# EAGLE board PCB moved parts (EAGLE 8.7.0)
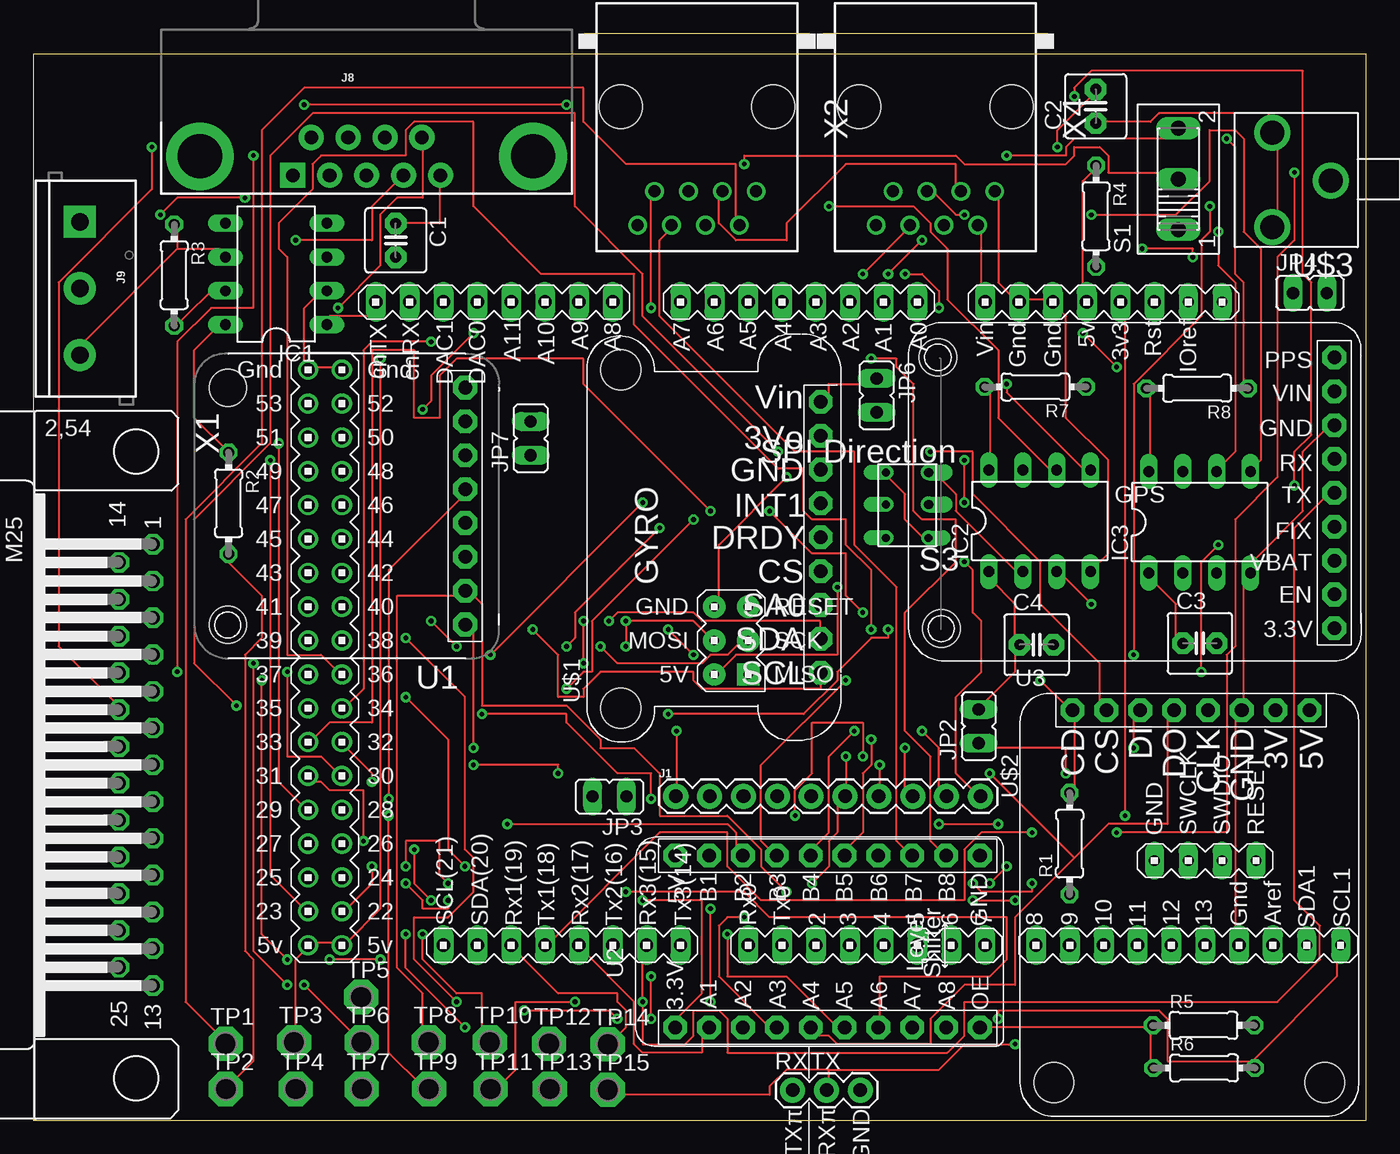
[diagram p0: board, top side]
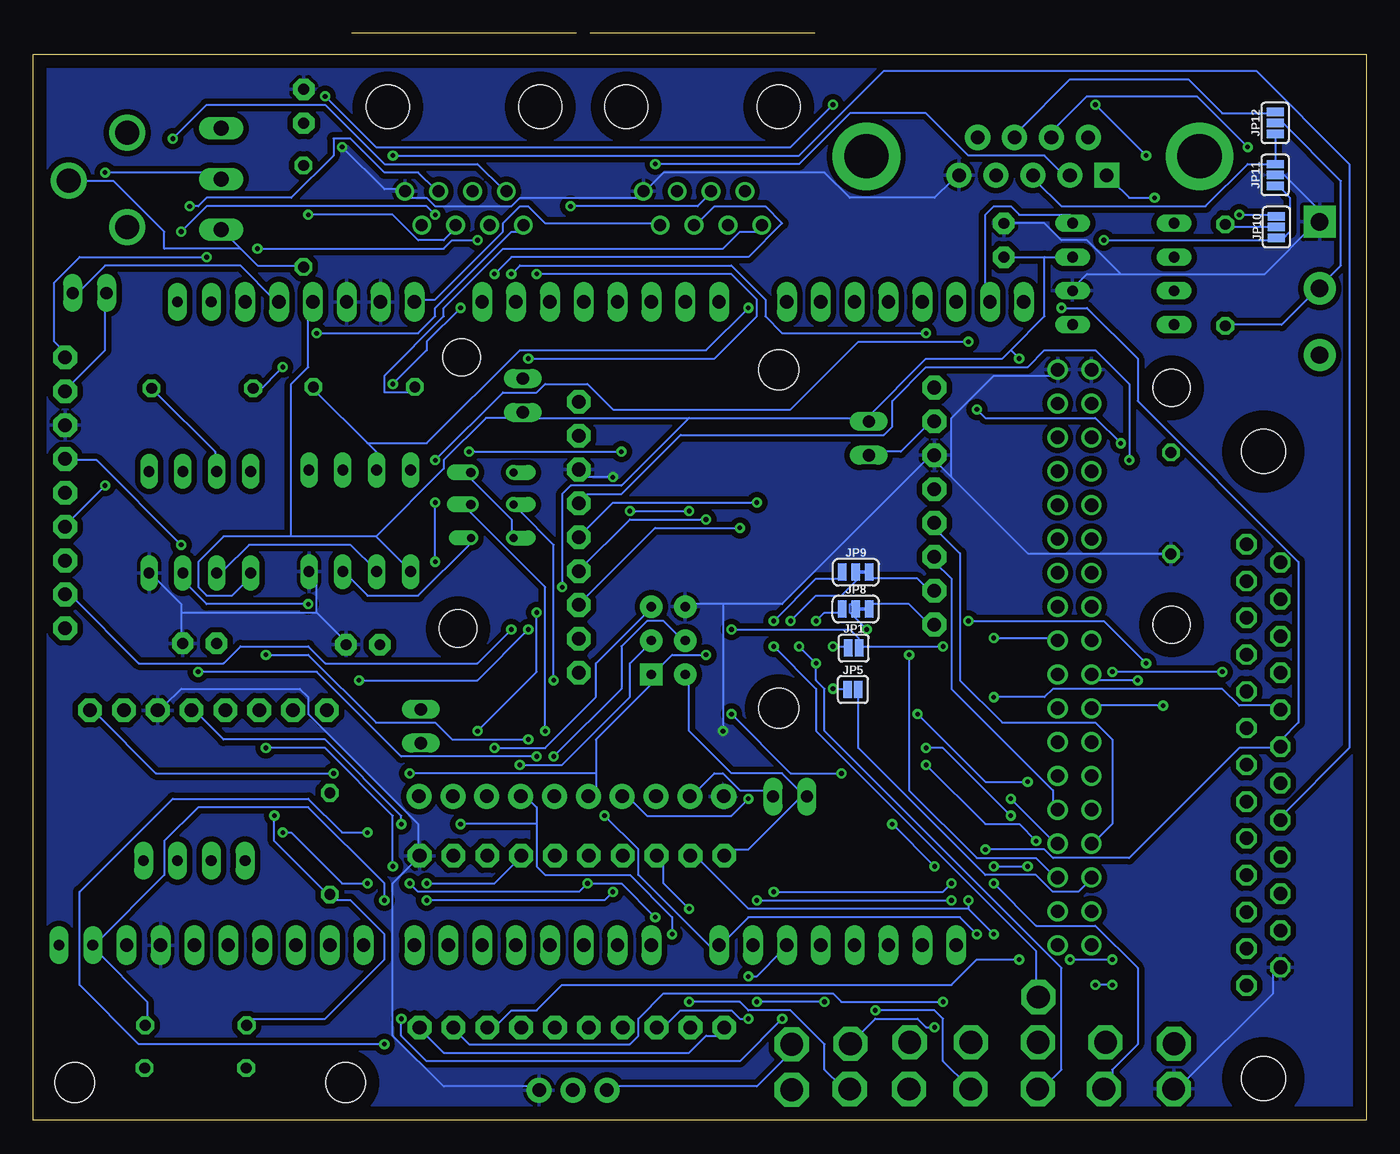
[diagram p1: board, bottom side, seen from below]

Size 100 x 80 mm. Coordinates in mm from the lower left corner, seen from the top.
Outline: 0,0 100,0 100,80 0,80 0,0
Copper layers (1*16): Top 0.035mm / dielectric 1.5mm / Bottom 0.035mm
Design rules "default": minimum track width 6mil, minimum drill 0.35mm, track to track 6mil, track to pad 6mil, pad to pad 6mil, via to via 6mil, smd to smd 6mil, copper to edge 40mil, drill to drill 6mil, minimum pad ring 10mil, minimum via ring 8mil, stop-mask expansion 4mil, vias tented up to drill 0mil, thermal gap 10mil
Net classes: 1 Power: width 0.508 mm, drill 0.305 mm, clearance 0.254 mm

## Footprints (pad centres in the part's own frame; a part is rotated, then mirrored left to right if it is on the bottom)
C2.5-5 = drill 0.813 pad 1.6 octagon: 1 -1.27,0; 2 1.27,0
DIL08 = drill 0.813 long: 1 -3.81,-3.81; 2 -1.27,-3.81; 3 1.27,-3.81; 4 3.81,-3.81; 5 3.81,3.81; 6 1.27,3.81; 7 -1.27,3.81; 8 -3.81,3.81
1X10 = drill 1.016 pad 1.88: 1 0,0; 2 2.54,0; 3 5.08,0; 4 7.62,0; 5 10.16,0; 6 12.7,0; 7 15.24,0; 8 17.78,0; 9 20.32,0; 10 22.86,0
1X03 = drill 1.016 pad 1.88: 1 2.54,0; 2 0,0; 3 -2.54,0
DB9_MALE = drill 1.016 pad 1.88: 1 5.54,-1.42; 2 2.77,-1.42; 3 0,-1.42; 4 -2.77,-1.42; 6 4.15,1.42; 7 1.38,1.42; 8 -1.38,1.42; 9 -4.15,1.42 | drill 1.016 pad 1.88 square: 5 -5.54,-1.42 | drill 3.302 pad 5.08: G1 -12.5,0; G2 12.5,0
SCREWTERMINAL-5MM-3 = drill 1.3 pad 2.413 square: 1 0,0 | drill 1.3 pad 2.413: 2 5,0; 3 10,0
SMT-JUMPER_2_NO_SILK = smd 0.635 x 1.27: 1 -0.406,0; 2 0.406,0
JP1 = drill 0.914 long: 1 0,-1.27; 2 0,1.27
SMT-JUMPER_3_1-NC_TRACE_SILK = smd 0.635 x 1.27: 1 -1.016,0; 2 0,0; 3 1.016,0
SMT-JUMPER_3_NO_SILK = smd 0.635 x 1.27: 1 -0.813,0; 2 0,0; 3 0.813,0
DUE(NORMAL) = drill 1 long: 2 -16.51,30.48; 3 -19.05,30.48; 3V3 -39.37,-17.78; 4 -21.59,30.48; 5 -24.13,30.48; 5V -36.83,-17.78; 6 -26.67,30.48; 7 -29.21,30.48; 8 -33.02,30.48; 9 -35.56,30.48; 10 -38.1,30.48; 11 -40.64,30.48; 12 -43.18,30.48; 13 -45.72,30.48; A0 -24.13,-17.78; A1 -21.59,-17.78; A2 -19.05,-17.78; A3 -16.51,-17.78; A4 -13.97,-17.78; A5 -11.43,-17.78; A6 -8.89,-17.78; A7 -6.35,-17.78; A8 -1.27,-17.78; A9 1.27,-17.78; A10 3.81,-17.78; A11 6.35,-17.78; AREF -50.8,30.48; CANRX 13.97,-17.78; CANTX 16.51,-17.78; DAC0 8.89,-17.78; DAC1 11.43,-17.78; GND1 -48.26,30.48; GND_1 -34.29,-17.78; GND_2 -31.75,-17.78; RESET -41.91,-17.78; RX0 -11.43,30.48; RX1 6.35,30.48; RX2 1.27,30.48; RX3 -3.81,30.48; SCL 11.43,30.48; SDA 8.89,30.48; TX0 -13.97,30.48; TX1 3.81,30.48; TX2 -1.27,30.48; TX3 -6.35,30.48; VIN -29.21,-17.78 | drill 1: 5V_A 19.05,30.48; 5V_B 21.59,30.48; 22 19.05,27.94; 23 21.59,27.94; 24 19.05,25.4; 25 21.59,25.4; 26 19.05,22.86; 27 21.59,22.86; 28 19.05,20.32; 29 21.59,20.32; 30 19.05,17.78; 31 21.59,17.78; 32 19.05,15.24; 33 21.59,15.24; 34 19.05,12.7; 35 21.59,12.7; 36 19.05,10.16; 37 21.59,10.16; 38 19.05,7.62; 39 21.59,7.62; 40 19.05,5.08; 41 21.59,5.08; 42 19.05,2.54; 43 21.59,2.54; 44 19.05,0; 45 21.59,0; 46 19.05,-2.54; 47 21.59,-2.54; 48 19.05,-5.08; 49 21.59,-5.08; 50 19.05,-7.62; 51 21.59,-7.62; 52 19.05,-10.16; 53 21.59,-10.16; GND_A 19.05,-12.7; GND_B 21.59,-12.7 | drill 0.7 pad 1.676: 5V_ICSP -8.89,5.08; GND_ICSP -8.89,10.16; MOSI_ICSP -8.89,7.62; RESET_ICSP -11.43,5.08; SCK_ICSP -11.43,7.62 | drill 0.8 pad 1.422 long: GND_DEBUG -41.91,24.13; IOREF -44.45,-17.78; NC -46.99,-17.78; RESET_DEBUG -49.53,24.13; SCL1 -55.88,30.48; SDA1 -53.34,30.48; SWCLK_DEBUG -44.45,24.13; SWDIO_DEBUG -46.99,24.13 | drill 0.7 pad 1.676 square: MISO_ICSP -11.43,10.16
0204/7 = drill 0.813 octagon: 1 -3.81,0; 2 3.81,0
255SB = drill 1.118 long: 1 -3.81,0; 2 0,0; 3 3.81,0
DPDT = drill 0.6 offset: 1 3.2,4.9; 2 3.2,2.4; 3 3.2,0; 4 0,4.9 | drill 0.7 offset: 5 0,2.4; 6 0,0
P1-17 = drill 1.702 pad 2.54 octagon: TP 0,0
ELCOMPASS = drill 1.016 pad 1.778 octagon: 1 1.27,1.27; 2 1.27,3.81; 3 1.27,6.35; 4 1.27,8.89; 5 1.27,11.43; 6 1.27,13.97; 7 1.27,16.51; 8 1.27,19.05 | hole 2.8: 19.066,19.07; 19.066,1.29
ELSHIFTER = drill 1.016 pad 1.778 octagon: 1 0,11.43; 2 0,8.89; 3 0,6.35; 4 0,3.81; 5 0,1.27; 6 0,-1.27; 7 0,-3.81; 8 0,-6.35; 9 0,-8.89; 10 0,-11.43; 11 12.89,11.43; 12 12.89,8.89; 13 12.89,6.35; 14 12.89,3.81; 15 12.89,1.27; 16 12.89,-1.27; 17 12.89,-3.81; 18 12.89,-6.35; 19 12.89,-8.89; 20 12.89,-11.43
ELGPS = drill 1.016 pad 1.778 octagon: 1 0,-10.16; 2 0,-7.62; 3 0,-5.08; 4 0,-2.54; 5 0,0; 6 0,2.54; 7 0,5.08; 8 0,7.62; 9 0,10.16 | hole 2.8: 29.48,10.18; 29.74,-10.18
ELGYRO = drill 1.016 pad 1.778 octagon: 1 21.59,2.54; 2 19.05,2.54; 3 16.51,2.54; 4 13.97,2.54; 5 11.43,2.54; 6 8.89,2.54; 7 6.35,2.54; 8 3.81,2.54; 9 1.27,2.54 | hole 3: -1.397,17.526; 24.003,17.526
ELSDCARD = drill 1.016 pad 1.778 octagon: 1 1.27,1.27; 2 1.27,3.81; 3 1.27,6.35; 4 1.27,8.89; 5 1.27,11.43; 6 1.27,13.97; 7 1.27,16.51; 8 1.27,19.05 | hole 3: -26.67,0.127; -26.67,20.447
2.5MMJACK = drill 1.8: 1 2,5.1; 2 6.4,1.5; 3 6.4,8.6
M25H = drill 1.016 octagon: 1 -16.561,1.27; 2 -13.792,1.27; 3 -11.049,1.27; 4 -8.28,1.27; 5 -5.512,1.27; 6 -2.769,1.27; 7 0,1.27; 8 2.769,1.27; 9 5.512,1.27; 10 8.28,1.27; 11 11.049,1.27; 12 13.792,1.27; 13 16.561,1.27; 14 -15.189,-1.27; 15 -12.421,-1.27; 16 -9.652,-1.27; 17 -6.909,-1.27; 18 -4.14,-1.27; 19 -1.372,-1.27; 20 1.372,-1.27; 21 4.14,-1.27; 22 6.909,-1.27; 23 9.652,-1.27; 24 12.421,-1.27; 25 15.189,-1.27 | hole 3.302: 23.52,0; -23.52,0
RJ45-NO-SHIELD = drill 0.9 pad 1.4: 1 -4.445,6.35; 2 -3.175,8.89; 3 -1.905,6.35; 4 -0.635,8.89; 5 0.635,6.35; 6 1.905,8.89; 7 3.175,6.35; 8 4.445,8.89 | hole 3.251: -5.715,0; 5.715,0

## Placement (x,y rotation side)
C1  0.1 uF  [C2.5-5]  27.19,66.03 270 top
C2  1 uF  [C2.5-5]  79.71,76.09 90 top
C3  0.1 uF  [C2.5-5]  87.52,35.79 0 top
C4  0.1 uF  [C2.5-5]  75.27,35.69 0 top
IC1  MCP2551  [DIL08]  18.22,63.51 90 top
IC2  DS8921  [DIL08]  75.51,44.98 0 top
IC3  DS8921  [DIL08]  87.51,44.88 0 top
J1  Optical Mouse  [1X10]  48.2,24.32 0 top
J2  RaspπUart  [1X03]  59.51,2.26 180 top
J8  DB9 Plug  [DB9_MALE]  25,72.33 0 top
J9  CAN Output  [SCREWTERMINAL-5MM-3]  3.49,67.42 270 top
JP1  [SMT-JUMPER_2_NO_SILK]  38.45,35.43 0 bottom
JP2  MicroSD Power  [JP1]  70.92,29.57 0 top
JP3  Mouse Power  [JP1]  43.23,24.3 90 top
JP4  GPS Power  [JP1]  95.78,62.07 270 top
JP5  [SMT-JUMPER_2_NO_SILK]  38.51,32.33 0 bottom
JP6  Gyro Power  [JP1]  63.28,54.39 180 top
JP7  Compass Power  [JP1]  37.31,51.17 0 top
JP8  [SMT-JUMPER_3_1-NC_TRACE_SILK]  38.3,38.37 0 bottom
JP9  [SMT-JUMPER_3_1-NC_TRACE_SILK]  38.29,41.13 0 bottom
JP10  [SMT-JUMPER_3_NO_SILK]  6.73,67.02 90 bottom
JP11  [SMT-JUMPER_3_NO_SILK]  6.83,70.93 90 bottom
JP12  [SMT-JUMPER_3_NO_SILK]  6.83,74.84 90 bottom
MCU2  DUE(NORMAL)  [DUE(NORMAL)]  42.2,43.62 180 top
R1  4.7 k  [0204/7]  77.75,20.76 90 top
R2  10 k  [0204/7]  14.65,46.3 270 top
R3  120  [0204/7]  10.57,63.42 270 top
R4  4.7 k  [0204/7]  79.73,67.84 270 top
R5  4.7 k  [0204/7]  87.8,7.13 0 top
R6  4.7 k  [0204/7]  87.84,3.93 0 top
R7  100  [0204/7]  75.18,55.03 180 top
R8  100  [0204/7]  87.32,54.93 180 top
S1  Click Source  [255SB]  85.91,70.63 90 top
S3  SPI Direction  [DPDT]  67.17,48.61 180 top
TP1  TPPAD1-17  [P1-17]  14.42,5.75 0 top
TP2  TPPAD1-17  [P1-17]  14.44,2.35 0 top
TP3  TPPAD1-17  [P1-17]  19.56,5.85 0 top
TP4  TPPAD1-17  [P1-17]  19.68,2.35 0 top
TP5  TPPAD1-17  [P1-17]  24.6,9.25 0 top
TP6  TPPAD1-17  [P1-17]  24.62,5.85 0 top
TP7  TPPAD1-17  [P1-17]  24.64,2.35 0 top
TP8  TPPAD1-17  [P1-17]  29.66,5.85 0 top
TP9  TPPAD1-17  [P1-17]  29.68,2.35 0 top
TP10  TPPAD1-17  [P1-17]  34.25,5.85 0 top
TP11  TPPAD1-17  [P1-17]  34.3,2.35 0 top
TP12  TPPAD1-17  [P1-17]  38.7,5.75 0 top
TP13  TPPAD1-17  [P1-17]  38.75,2.35 0 top
TP14  TPPAD1-17  [P1-17]  43.1,5.7 0 top
TP15  TPPAD1-17  [P1-17]  43.1,2.3 0 top
U1  COMPASS  [ELCOMPASS]  33.67,56.25 180 top
U2  LLSHIFTER  [ELSHIFTER]  59.59,6.97 90 top
U3  GPS  [ELGPS]  97.61,47.08 180 top
U$1  Gyro  [ELGYRO]  61.61,32.32 90 top
U$2  Micro-SD  [ELSDCARD]  97.02,29.5 90 top
U$3  [2.5MMJACK]  99.36,75.6 180 top
X1  Vehicle control  [M25H]  7.71,26.67 270 top
X2  RJ45-8L-B  [RJ45-NO-SHIELD]  49.79,76.05 180 top
X4  RJ45-8L-B  [RJ45-NO-SHIELD]  67.68,76.05 180 top

## Library data of the parts
C1-C4 = capacitor-wima
IC1-IC3 = ic-package
J1 = SparkFun-Connectors; PROD_ID: CONN-11563
J2 = tx_rxRasp
J8 = SparkFun-Connectors; PROD_ID: CONN-09904; SPICEPREFIX: X
J9 = SparkFun-Connectors; PROD_ID: CONN-10134; SF_SKU: PRT-08433
JP1 JP5 JP8-JP12 = SparkFun-Jumpers
JP2-JP4 JP6 JP7 = jumper
MCU2 = DUElib130425
R1 R4-R6 = resistor
R2 R3 R7 R8 = rcl; SPICEPREFIX: R
S1 = switch
S3 U$1-U$3 = ELCano_Footprints
TP1-TP15 = testpad
U1 = ELCOMPASS
U2 = ELSHIFTER
U3 = ELGPS
X1 = con-subd; OC_FARNELL: unknown; OC_NEWARK: unknown
X2 X4 = con-tycoelectronics; MF: TYCO ELECTRONICS; MPN: RJ45-8L-B; OC_FARNELL: 1279843; OC_NEWARK: 52K4445

## Nets
+3V3: JP4.2 MCU2.3V3 R1.1 R5.1 R6.1 TP4.TP U2.1 U2.10
+5V: C1.2 C3.1 C4.1 IC1.3 IC2.1 IC3.1 JP2.2 JP3.2 JP6.2 JP7.2 MCU2.5V MCU2.5V_A MCU2.5V_B MCU2.GND_ICSP R4.1 TP3.TP U2.11
C2_RX: J8.8 TP13.TP U2.13 X1.18
C2_TX: J8.6 TP12.TP U2.12 X1.19
CANH: IC1.7 J9.2 JP12.2 R3.2
CANL: IC1.6 J9.3 JP10.2 R3.1
CANRX: IC1.4 MCU2.CANRX
CANTX: IC1.1 MCU2.CANTX
CARD_DETECT: MCU2.36 R1.2 U$2.8
CLICK: J8.4 S1.2 U2.17
CS_C5_FRONT: MCU2.37 U2.8
CS_C5_FRONT_5V: U2.18 X2.6
CS_C5_REAR: MCU2.38 U2.9
CS_C5_REAR_5V: U2.19 X4.6
CS_GYRO: JP5.2 MCU2.25
CS_MOUSE: J1.4 MCU2.32
CS_SD: MCU2.35 U$2.7
DRDY_C: MCU2.26 U1.4
DRDY_G: MCU2.24 U$1.5
EN: MCU2.31 U3.8
FIX: MCU2.30 U3.6
GND: C1.1 C2.2 C3.2 C4.2 IC1.2 IC2.4 IC3.4 J1.1 J2.3 J8.1 J9.1 JP11.2 MCU2.5V_ICSP MCU2.GND1 MCU2.GND_1 MCU2.GND_2 MCU2.GND_A MCU2.GND_B R2.2 TP2.TP U1.3 U2.20 U3.3 U$1.3 U$2.3 X1.25 X2.1 X4.1
GPS_RX: MCU2.TX3 TP10.TP U3.4
GPS_TX: MCU2.RX3 TP11.TP U3.5
I1: MCU2.27 U1.5
I2: MCU2.28 U1.6
INT1: MCU2.23 U$1.4
LED: J1.10 MCU2.34
MISO: J1.5 JP1.2 MCU2.MISO_ICSP TP6.TP U2.5 U$2.5
MISO+: IC2.6 X2.5
MISO+R: IC3.6 X4.5
MISO-: IC2.5 X2.4
MISO-R: IC3.5 X4.4
MISO_5V: S3.5 U2.15
MOSI: J1.6 JP9.1 MCU2.MOSI_ICSP TP5.TP U2.4 U$2.6
MOSI+: IC2.8 R7.2 X2.8
MOSI+R: IC3.8 R8.2 X4.8
MOSI-: IC2.7 R7.1 X2.7
MOSI-R: IC3.7 R8.1 X4.7
MOSI_5V: S3.2 U2.14
N$1: C2.1 U$3.2 U$3.3
N$2: IC2.2 IC3.2 S3.1 S3.6
N$3: IC2.3 IC3.3 S3.3 S3.4
N$4: MCU2.TX2 U2.3
N$5: MCU2.RX2 U2.2
N$6: S1.3 X1.21
N$7: R4.2 S1.1 U$3.1
N$8: JP7.1 U1.2
N$9: JP6.1 U$1.1
N$10: JP2.1 U$2.1
N$11: J8.3 JP11.3 JP12.1
N$12: MCU2.22 U2.7
N$13: J1.2 JP3.1
N$14: JP4.1 U3.2
N$15: J8.5 JP10.3
N$16: J8.7 JP12.3
N$17: IC1.8 R2.1
N$18: J8.2 JP10.1 JP11.1
N$19: JP5.1 U$1.6
N$20: JP1.1 U$1.7
N$21: JP9.2 U$1.8
N$22: JP8.2 U$1.9
NPD: J1.9 MCU2.33
PPS: MCU2.29 U3.1
RPI_RX: J2.2 MCU2.TX1 TP15.TP
RPI_TX: J2.1 MCU2.RX1 TP14.TP
RST: J1.8 MCU2.RESET_ICSP
SCK: J1.7 JP8.1 MCU2.SCK_ICSP TP7.TP U2.6 U$2.4
SCK_5V: U2.16 X2.3 X4.3
SCL1: JP8.3 MCU2.SCL1 R6.2 TP9.TP U1.8
SDA1: JP9.3 MCU2.SDA1 R5.2 TP8.TP U1.7
VIN: MCU2.VIN TP1.TP X2.2 X4.2

## Tracks (layer width: path | path; a pad name or v marks a point on that pad's centre or on a via)
+3V3  (via drill 0.35)
  Top 0.152: v27.94,17.78 29.21,16.51 29.21,15.88 31.11,15.88 v31.11,16.51 | v45.72,16.51 50.16,16.51 50.16,9.53 48.26,7.62 48.26,6.99 U2.1 | 83.82,6.99 83.82,4.45 R6.1 | v81.92,22.86 81.92,60.96 MCU2.3V3 | 83.82,6.99 71.12,6.99 U2.10 | 83.82,6.99 R5.1
  Bottom 0.152: U2.1 48.26,6.35 49.53,6.35 50.8,5.08 69.22,5.08 70.48,6.35 U2.10 | v27.94,17.78 24.77,14.61 20.32,14.61 17.14,11.43 17.14,5.71 19.05,3.81 19.05,2.54 TP4.TP | v45.72,16.51 v31.11,16.51 | JP4.2 96.52,62.23 94.61,64.14 84.45,64.14 81.92,61.59 MCU2.3V3 | R5.1 83.82,7.62 78.11,7.62 73.66,12.06 73.66,13.97 76.2,16.51 77.47,16.51 R1.1 78.11,17.14 81.92,20.95 v81.92,22.86
+5V  (via drill 0.35)
  Top 0.152: R4.1 79.38,71.12 78.74,70.48 78.74,61.59 MCU2.5V | IC3.1 83.82,40.64 85.72,38.73 85.72,36.2 C3.1 | IC2.1 71.75,40.64 73.66,38.73 73.66,36.2 C4.1 73.66,35.56 73.66,33.66 71.12,31.11 JP2.2 | TP3.TP 19.68,6.35 19.68,12.06 20.32,12.7 MCU2.5V_B 20.95,13.34 22.86,13.34 MCU2.5V_A 23.5,13.34 26.04,15.88 v26.04,57.15 | v60.33,40.01 60.33,34.92 52.7,34.92 51.44,33.66 MCU2.GND_ICSP
  Bottom 0.152: 74.3,43.81 80.64,43.81 | 80.64,43.81 85.72,43.81 87.63,41.91 87.63,40.01 87,39.37 85.09,39.37 83.82,40.64 IC3.1 | 74.3,43.81 71.75,41.27 IC2.1 | 80.64,43.81 80.64,55.24 79.38,56.52 79.38,60.96 MCU2.5V | U2.11 47.62,20.32 46.35,20.32 42.55,24.13 JP3.2 42.55,24.77 43.81,26.04 47.62,26.04 50.8,29.21 50.8,33.02 MCU2.GND_ICSP | 24.13,64.77 26.67,64.77 C1.2 | 24.13,64.77 22.23,64.77 IC1.3 | 50.8,52.7 62.87,52.7 JP6.2 63.5,52.7 66.04,52.7 69.22,49.53 69.22,48.9 74.3,43.81 | 50.8,52.7 37.47,52.7 | 24.13,64.77 24.13,60.33 26.67,57.78 | 26.67,57.78 27.3,57.15 33.02,57.15 37.47,52.7 | 37.47,52.7 JP7.2 | 26.67,57.78 v26.04,57.15 | v60.33,40.01 60.33,46.99 59.69,47.62 55.88,47.62 50.8,52.7
C2_RX  (via drill 0.35)
  Top 0.152: v50.8,8.89 v50.8,15.88 | v8.89,73.03 8.89,69.85 1.91,62.87 1.91,35.56 6.35,31.11 X1.18 | v35.56,22.23 52.07,22.23 52.7,21.59 52.7,20.32 U2.13 | v32.38,19.05 31.11,20.32 31.11,28.57 v27.94,31.75
  Bottom 0.152: v50.8,15.88 52.7,17.78 52.7,19.68 U2.13 | v50.8,8.89 46.99,8.89 46.35,8.26 43.18,8.26 40.64,5.71 40.64,3.81 39.37,2.54 TP13.TP | v8.89,73.03 12.7,76.83 20.95,76.83 23.5,74.3 J8.8 | v32.38,19.05 v35.56,22.23 | v27.94,31.75 24.13,31.75 23.5,32.38 10.79,32.38 9.53,31.11 6.99,31.11 X1.18
C2_TX  (via drill 0.35)
  Top 0.152: v27.94,13.97 27.94,11.43 v32.38,6.99 | v22.86,60.96 26.04,64.14 26.04,67.94 27.3,69.22 29.21,69.22 29.21,73.66 J8.6 | v29.84,16.51 28.57,17.78 v28.57,20.32
  Bottom 0.152: 29.84,15.88 46.35,15.88 50.16,19.68 U2.12 | v27.94,13.97 29.84,15.88 | v32.38,6.99 33.02,6.99 33.66,7.62 36.83,7.62 TP12.TP | v22.86,60.96 20.95,60.96 17.14,57.15 17.14,53.98 5.08,41.91 5.08,29.84 6.35,28.57 X1.19 6.99,27.94 9.53,27.94 17.78,19.68 23.5,19.68 24.13,20.32 v28.57,20.32 | v29.84,16.51 29.84,15.88
CANH
  Top 0.152: R3.2 10.79,59.69 13.97,62.87 IC1.7
  Bottom 0.152: JP12.2 6.35,74.93 1.91,70.48 1.91,64.14 3.17,62.87 J9.2 3.81,62.23 6.35,59.69 10.16,59.69 R3.2
CANL
  Top 0.152: 10.79,65.41 13.97,65.41 IC1.6 | 10.79,65.41 10.79,66.67 R3.1 | 10.79,65.41 3.81,58.42 3.81,57.78 J9.3
  Bottom 0.152: JP10.2 10.36,67.02 R3.1
CANRX
  Bottom 0.152: IC1.4 22.23,67.94 26.04,67.94 26.67,68.58 27.94,68.58 28.57,67.94 28.57,61.59 MCU2.CANRX
CANTX
  Top 0.152: IC1.1 22.23,60.33 25.4,60.33 25.4,60.96 MCU2.CANTX
CARD_DETECT  (via drill 0.35)
  Top 0.152: R1.2 78.11,24.77 78.11,30.48 U$2.8 77.47,31.11 v75.56,33.02 | v62.87,36.83 62.87,41.27 60.96,43.18 60.96,45.09 58.42,45.09 57.78,45.72 57.78,48.9 55.88,48.9 45.09,59.69 45.09,63.5 38.1,63.5 33.02,68.58 33.02,74.93 28.57,74.93 27.94,74.3 27.94,72.39 21.59,72.39 20.95,71.75 20.95,69.85 18.41,67.31 18.41,65.41 19.05,64.77 19.05,34.92 21.59,34.92 22.86,33.66 MCU2.36
  Bottom 0.152: v62.87,36.83 66.67,33.02 v75.56,33.02
CLICK  (via drill 0.35)
  Top 0.152: v53.34,71.75 53.34,72.39 69.22,72.39 69.85,71.75 77.47,71.75 78.11,72.39 78.11,73.03 80.01,73.03 80.64,72.39 80.64,71.12 85.72,71.12 S1.2 | v70.48,17.78 71.12,17.14 74.93,17.14 v74.93,17.78 | v81.28,21.59 89.53,21.59 89.53,34.92 90.17,35.56 90.17,45.09 93.34,48.26 93.34,64.77 94.61,66.04 v94.61,71.12
  Bottom 0.152: v53.34,71.75 42.55,71.75 38.73,75.56 33.02,75.56 29.84,72.39 24.13,72.39 22.86,71.12 J8.4 | v70.48,17.78 65.41,17.78 63.5,19.68 U2.17 | v74.93,17.78 76.83,17.78 80.64,21.59 v81.28,21.59 | v94.61,71.12 86.36,71.12 S1.2
CS_C5_FRONT  (via drill 0.35)
  Top 0.152: v17.14,33.02 17.14,13.97 v19.05,12.06 | v26.04,12.06 v22.23,12.06
  Bottom 0.152: v17.14,33.02 20.32,33.02 MCU2.37 | v22.23,12.06 v19.05,12.06 | v26.04,12.06 29.21,12.06 31.11,10.16 60.33,10.16 62.23,8.26 64.14,8.26 65.41,6.99 U2.8
CS_C5_FRONT_5V
  Top 0.152: X2.6 47.62,66.67 46.99,66.04 46.99,60.33 57.15,50.16 61.59,50.16 61.59,43.18 64.77,40.01 64.77,20.95 65.41,20.32 U2.18
CS_C5_REAR  (via drill 0.35)
  Top 0.152: v27.94,36.2 32.38,31.75 32.38,20.32 33.02,19.68 33.02,17.14 31.11,15.24 28.57,15.24 28.57,12.06 v31.75,8.89
  Bottom 0.152: v27.94,36.2 23.5,36.2 MCU2.38 | v31.75,8.89 39.37,8.89 40.01,9.53 52.7,9.53 54.61,7.62 54.61,6.35 55.24,5.71 67.31,5.71 67.94,6.35 U2.9
CS_C5_REAR_5V  (via drill 0.35)
  Top 0.152: v62.23,63.5 65.41,66.67 X4.6 | v62.87,57.15 64.77,57.15 64.77,56.52 66.04,55.24 66.04,45.72 66.67,45.09 69.22,45.09 69.22,41.91 65.41,38.1 65.41,29.21 67.31,27.3 67.31,20.95 67.94,20.32 U2.19
  Bottom 0.152: v62.23,63.5 47.62,63.5 45.72,61.59 45.72,60.33 48.9,57.15 v62.87,57.15
CS_GYRO
  Bottom 0.152: JP5.2 38.1,31.75 38.1,27.94 28.57,18.41 24.77,18.41 23.5,17.14 21.59,17.14 20.95,17.78 MCU2.25
CS_MOUSE  (via drill 0.35)
  Top 0.152: v25.4,25.4 25.4,26.04 23.5,27.94 MCU2.32 | v33.66,30.48 40.01,30.48 40.01,29.84 43.81,26.04 46.35,26.04 v46.35,24.13
  Bottom 0.152: v25.4,25.4 28.57,25.4 v33.66,30.48 | v46.35,24.13 47.62,22.86 53.98,22.86 55.24,24.13 J1.4
CS_SD  (via drill 0.35)
  Top 0.152: v15.24,31.11 12.06,34.29 12.06,45.09 17.78,50.8 17.78,72.39 20.95,75.56 40.64,75.56 40.64,68.58 45.72,63.5 45.72,60.33 v55.88,50.16 | v67.31,50.16 70.48,50.16 70.48,46.99 75.56,41.91 75.56,38.73 80.01,34.29 80.01,31.11 U$2.7
  Bottom 0.152: v15.24,31.11 20.32,31.11 MCU2.35 | v67.31,50.16 v55.88,50.16
DRDY_C  (via drill 0.35)
  Top 0.152: v26.67,24.13 26.67,41.27 32.38,46.99 U1.4
  Bottom 0.152: v26.67,24.13 23.5,20.95 MCU2.26
DRDY_G  (via drill 0.35)
  Top 0.152: v45.72,46.35 v34.29,34.92
  Bottom 0.152: v34.29,34.92 34.29,24.77 29.21,19.68 24.77,19.68 23.5,18.41 MCU2.24 | v45.72,46.35 56.52,46.35 59.05,43.81 U$1.5
EN  (via drill 0.35)
  Top 0.152: v24.77,20.95 24.77,24.77 22.23,24.77 21.59,25.4 20.95,25.4 MCU2.31 | v33.02,26.67 39.37,26.67 v39.37,26.04 | v47.62,30.48 57.78,30.48 60.33,33.02 60.33,33.66 62.87,36.2 64.14,36.2 v64.14,36.83
  Bottom 0.152: v24.77,20.95 26.04,22.23 28.57,22.23 v33.02,26.67 | v39.37,26.04 43.18,26.04 v47.62,30.48 | v64.14,36.83 66.67,34.29 78.11,34.29 79.38,35.56 84.45,35.56 85.72,34.29 92.08,34.29 97.16,39.37 U3.8
FIX  (via drill 0.35)
  Top 0.152: v19.05,33.66 19.05,27.3 21.59,27.3 22.86,26.04 MCU2.30 | v10.79,33.66 10.79,58.42 13.34,60.96 16.51,60.96 v16.51,72.39 | v40.01,76.2 v20.32,76.2 | v78.11,76.83 78.11,77.47 79.38,78.74 95.25,78.74 95.25,63.5 95.89,62.87 95.89,51.44 94.61,50.16 v94.61,47.62
  Bottom 0.152: v10.79,33.66 v19.05,33.66 | v20.32,76.2 v16.51,72.39 | v40.01,76.2 43.18,73.03 74.3,73.03 v78.11,76.83 | v94.61,47.62 97.16,45.09 U3.6
GND  (via drill 0.35)
  Top 0.152: v76.83,73.03 76.83,74.3 79.38,76.83 C2.2 | X4.1 72.39,69.22 72.39,62.87 73.66,61.59 MCU2.GND_2 74.3,61.59 76.2,61.59 MCU2.GND_1 76.83,60.96 77.47,60.33 77.47,52.7 80.64,49.53 80.64,42.55 79.38,41.27 IC2.4 | MCU2.GND1 90.17,13.34 90.17,30.48 U$2.3 90.81,31.11 90.81,40.64 IC3.4 91.44,41.27 91.44,41.91 95.25,45.72 95.25,50.16 97.16,52.07 U3.3 | C1.1 27.3,67.31 30.48,67.31 30.48,70.48 J8.1 | IC1.2 21.59,62.23 20.32,60.96 20.32,56.52 MCU2.GND_B 20.95,56.52 22.86,56.52 MCU2.GND_A | v56.52,48.26 51.44,43.18 51.44,38.73 MCU2.5V_ICSP | v48.26,29.21 48.26,24.77 J1.1 | TP2.TP 14.61,2.54 16.51,4.45 16.51,12.06 15.88,12.7 15.88,34.92 17.14,36.2 17.14,39.37 14.61,41.91 R2.2
  Bottom 0.152: v76.83,73.03 73.66,69.85 72.39,69.85 X4.1 71.75,69.22 70.48,69.22 69.85,68.58 64.14,68.58 63.5,69.22 54.61,69.22 X2.1 53.98,69.85 52.7,71.12 40.64,71.12 38.73,69.22 32.38,69.22 31.11,70.48 J8.1 | J2.3 62.23,2.54 69.22,2.54 73.03,6.35 73.03,17.78 71.12,19.68 U2.20 71.12,20.32 71.12,22.23 79.38,30.48 79.38,31.75 80.01,32.38 88.9,32.38 90.17,31.11 U$2.3 | 78.74,38.1 78.74,40.64 IC2.4 | 78.74,38.1 76.83,36.2 C4.2 | 88.9,38.1 88.9,38.73 90.81,40.64 IC3.4 | 88.9,38.1 88.9,36.2 C3.2 | 88.9,38.1 78.74,38.1 | JP11.2 6.35,71.12 3.17,67.94 J9.1 3.81,67.31 7.62,63.5 18.41,63.5 | 18.41,63.5 20.95,63.5 21.59,62.87 IC1.2 | 18.41,63.5 20.95,66.04 22.86,66.04 24.13,67.31 26.67,67.31 C1.1 | X1.25 6.99,11.43 6.99,9.53 13.97,2.54 TP2.TP | 31.11,48.26 32.38,49.53 U1.3 33.02,49.53 43.81,38.73 48.26,38.73 | 31.11,48.26 25.4,42.55 15.24,42.55 R2.2 | 48.26,38.73 50.8,38.73 MCU2.5V_ICSP | v56.52,48.26 59.05,48.26 U$1.3 | 48.26,38.73 v48.26,29.21 | 31.11,48.26 31.11,52.7 27.94,55.88 23.5,55.88 MCU2.GND_A
  pour Bottom (isolate 0.406): 0,80 100,80 100,0 0,0 0,1.1
GPS_RX  (via drill 0.35)
  Top 0.152: v29.21,13.97 29.21,12.06 31.75,9.53 33.66,9.53 33.66,6.35 TP10.TP | v88.9,43.18 87.63,41.91 v87.63,33.66 | v62.23,27.3 62.23,29.84 58.42,29.84 58.42,26.04 57.15,24.77 v57.15,22.86
  Bottom 0.152: v29.21,13.97 30.48,15.24 46.35,15.24 48.26,13.34 MCU2.TX3 48.9,12.7 54.61,18.41 54.61,20.32 v57.15,22.86 | v88.9,43.18 95.25,49.53 97.16,49.53 U3.4 | v87.63,33.66 78.74,33.66 72.39,27.3 v62.23,27.3
GPS_TX  (via drill 0.35)
  Top 0.152: v40.64,8.89 36.2,8.89 36.2,3.81 34.92,2.54 TP11.TP | MCU2.RX3 45.72,12.7 v45.72,8.89 45.72,5.71 48.9,5.71 49.53,6.35 49.53,8.26 51.44,8.26 52.07,7.62 52.07,5.08 68.58,5.08 69.85,6.35 69.85,8.89 93.34,8.89 96.52,12.06 96.52,14.61 94.61,16.51 94.61,44.45 97.16,46.99 U3.5
  Bottom 0.152: v40.64,8.89 v45.72,8.89
I1
  Bottom 0.152: MCU2.27 20.32,20.95 19.05,22.23 19.05,28.57 20.32,29.84 27.3,29.84 30.48,33.02 30.48,42.55 32.38,44.45 U1.5
I2
  Bottom 0.152: MCU2.28 23.5,23.5 23.5,24.77 31.11,32.38 31.11,40.64 32.38,41.91 U1.6
INT1  (via drill 0.35)
  Top 0.152: v17.78,49.53 17.78,18.41 20.32,15.88 MCU2.23
  Bottom 0.152: v17.78,49.53 17.78,55.24 20.32,57.78 24.13,57.78 25.4,56.52 33.02,56.52 35.56,53.98 35.56,52.07 36.2,51.44 51.44,51.44 55.88,46.99 58.42,46.99 59.05,46.35 U$1.4
LED  (via drill 0.35)
  Top 0.152: v29.84,58.42 25.4,58.42 24.77,57.78 24.77,32.38 23.5,31.11 MCU2.34 | v69.85,46.35 v69.85,49.53 | v69.85,41.91 70.48,41.27 70.48,38.1 71.12,37.47 71.12,33.66 69.22,31.75 69.22,26.04 70.48,24.77 J1.10
  Bottom 0.152: v29.84,58.42 38.1,58.42 43.18,53.34 56.52,53.34 58.42,55.24 61.59,55.24 62.23,54.61 64.77,54.61 v69.85,49.53 | v69.85,41.91 v69.85,46.35
MISO  (via drill 0.35)
  Top 0.152: 78.11,19.68 80.64,22.23 85.09,22.23 85.09,30.48 U$2.5 | 78.11,19.68 73.66,15.24 73.66,10.16 69.85,10.16 67.31,7.62 67.31,5.71 60.33,5.71 59.69,6.35 58.42,6.35 U2.5 | v49.53,34.92 v47.62,36.83 | v20.32,10.16 24.13,6.35 TP6.TP | v19.05,10.16 16.51,12.7 v16.51,34.29 | v31.75,35.56 v29.84,37.47 | v71.75,26.04 78.11,19.68
  Bottom 0.152: 38.1,35.56 38.1,36.2 38.73,36.83 v47.62,36.83 | v49.53,34.92 52.07,34.92 53.34,33.66 MCU2.MISO_ICSP 53.34,33.02 57.78,28.57 57.78,26.04 | 57.78,26.04 57.78,24.77 J1.5 | v19.05,10.16 v20.32,10.16 | v16.51,34.29 19.68,37.47 v29.84,37.47 | 38.1,35.56 v31.75,35.56 | 38.1,35.56 JP1.2 | 57.78,26.04 v71.75,26.04
MISO+  (via drill 0.35)
  Top 0.152: v59.69,68.58 66.04,68.58 67.31,67.31 67.31,66.67 68.58,65.41 68.58,61.59 72.39,57.78 72.39,52.7 76.2,48.9 IC2.6
  Bottom 0.152: v59.69,68.58 50.16,68.58 49.53,69.22 X2.5
MISO+R  (via drill 0.35)
  Top 0.152: v88.9,66.67 88.9,64.14 90.17,62.87 90.17,50.16 88.9,48.9 IC3.6 | v69.85,67.94 69.22,67.94 67.31,69.85 X4.5
  Bottom 0.152: v88.9,66.67 87,68.58 70.48,68.58 v69.85,67.94
MISO-  (via drill 0.35)
  Top 0.152: v73.03,55.24 73.03,54.61 78.74,48.9 IC2.5 | v67.94,60.96 67.94,62.23 66.67,63.5 v65.41,63.5
  Bottom 0.152: v73.03,55.24 70.48,57.78 70.48,58.42 v67.94,60.96 | v65.41,63.5 64.14,64.77 46.35,64.77 43.81,67.31 45.09,68.58 48.9,68.58 50.16,67.31 X2.4
MISO-R  (via drill 0.35)
  Top 0.152: v79.38,67.94 85.72,67.94 88.27,70.48 88.27,74.3 90.17,74.3 90.81,73.66 90.81,66.67 92.08,65.41 92.08,49.53 91.44,48.9 IC3.5
  Bottom 0.152: v79.38,67.94 73.03,67.94 71.12,66.04 69.22,66.04 68.58,66.67 X4.4
MISO_5V  (via drill 0.35)
  Top 0.152: v61.59,29.21 59.69,27.3 59.69,21.59 58.42,20.32 U2.15
  Bottom 0.152: v61.59,29.21 61.59,40.01 67.31,45.72 S3.5
MOSI  (via drill 0.35)
  Top 0.152: v53.34,15.24 52.07,15.24 51.44,14.61 51.44,10.79 55.24,6.99 U2.4 | v58.42,17.78 59.69,19.05 59.69,20.95 60.33,21.59 60.33,24.13 J1.6 60.96,24.77 v60.96,27.3 | v82.55,27.94 82.55,30.48 U$2.6 | v71.75,17.78 v73.03,19.05 | MCU2.MOSI_ICSP 50.8,36.2 49.53,37.47 v44.45,37.47 v44.45,35.56
  Bottom 0.152: v53.34,15.24 55.88,17.78 v58.42,17.78 59.05,17.14 71.12,17.14 v71.75,17.78 | v82.55,27.94 78.11,27.94 73.03,22.86 v73.03,19.05 | v44.45,37.47 41.27,40.64 39.37,40.64 JP9.1 | v44.45,35.56 41.27,32.38 41.27,29.21 24.77,12.7 24.77,9.53 TP5.TP | v60.96,27.3 55.88,32.38 55.88,35.56 53.98,37.47 52.7,37.47 51.44,36.2 MCU2.MOSI_ICSP
MOSI+
  Top 0.152: IC2.8 71.75,48.9 71.75,54.61 R7.2
  Bottom 0.152: X2.8 45.72,66.67 46.99,66.67 48.26,65.41 64.77,65.41 69.22,60.96 69.22,60.33 73.66,55.88 73.66,54.61 71.75,54.61 R7.2
MOSI+R  (via drill 0.35)
  Top 0.152: R8.2 83.82,54.61 83.82,48.9 IC3.8 | v81.28,56.52 v78.74,59.05
  Bottom 0.152: v78.74,59.05 71.12,59.05 69.85,60.33 69.85,60.96 64.14,66.67 63.5,66.67 X4.8 | v81.28,56.52 83.19,54.61 R8.2
MOSI-  (via drill 0.35)
  Top 0.152: v46.35,60.96 46.35,69.22 X2.7
  Bottom 0.152: 74.93,50.8 78.74,54.61 R7.1 | 74.93,50.8 74.3,50.16 74.3,48.9 IC2.7 | v46.35,60.96 49.53,57.78 63.5,57.78 70.48,50.8 74.93,50.8
MOSI-R  (via drill 0.35)
  Top 0.152: v89.53,73.66 90.17,73.03 90.17,63.5 90.81,62.87 90.81,55.24 R8.1
  Bottom 0.152: IC3.7 86.36,48.9 86.36,50.16 90.81,54.61 R8.1 | v89.53,73.66 87,76.2 78.11,76.2 73.66,71.75 66.67,71.75 64.77,69.85 X4.7
MOSI_5V  (via drill 0.35)
  Top 0.152: v60.96,33.02 54.61,26.67 54.61,20.95 55.24,20.32 U2.14
  Bottom 0.152: v60.96,33.02 60.96,43.18 63.5,45.72 S3.2
N$1
  Top 0.152: C2.1 80.01,74.93 83.82,74.93 84.45,75.56 92.71,75.56 92.71,74.3 U$3.2 93.34,73.66 93.34,67.31 U$3.3
N$2
  Top 0.152: IC2.2 73.66,41.27 69.22,45.72 69.22,46.99 67.31,48.9 S3.6
  Bottom 0.152: S3.1 64.14,43.81 64.14,45.09 67.31,48.26 S3.6 | IC3.2 85.72,41.27 83.82,43.18 76.2,43.18 74.3,41.27 IC2.2
N$3  (via drill 0.35)
  Top 0.152: S3.3 64.14,48.26 65.41,46.99 65.41,45.09 66.67,43.81 S3.4 | v79.38,38.73 76.83,41.27 IC2.3
  Bottom 0.152: v79.38,38.73 87,38.73 88.27,40.01 88.27,40.64 IC3.3 | S3.4 67.31,43.18 71.12,39.37 74.93,39.37 76.2,40.64 IC2.3
N$4  (via drill 0.35)
  Top 0.152: v46.35,7.62 v46.35,10.79
  Bottom 0.152: v46.35,10.79 45.72,10.79 43.81,12.7 MCU2.TX2 | v46.35,7.62 46.99,7.62 47.62,8.26 51.44,8.26 52.7,6.99 U2.3
N$5
  Top 0.152: MCU2.RX2 41.27,12.7 45.09,8.89 45.09,5.71 45.72,5.08 50.16,5.08 50.16,6.35 U2.2
N$6  (via drill 0.35)
  Top 0.152: v73.03,72.39 77.47,72.39 77.47,73.03 78.11,73.66 85.72,73.66 85.72,74.3 S1.3
  Bottom 0.152: v73.03,72.39 42.55,72.39 36.2,78.74 8.26,78.74 1.27,71.75 1.27,27.94 6.35,22.86 X1.21
N$7
  Bottom 0.152: 84.45,65.41 85.72,66.67 S1.1 | 84.45,65.41 83.19,64.14 80.01,64.14 R4.2 | 84.45,65.41 90.17,65.41 90.17,66.67 93.98,70.48 97.16,70.48 U$3.1
N$8
  Bottom 0.152: JP7.1 36.83,50.16 34.92,50.16 33.02,52.07 U1.2
N$9
  Top 0.152: JP6.1 62.87,55.24 59.69,55.24 59.69,53.98 U$1.1
N$10  (via drill 0.35)
  Top 0.152: v77.47,26.04 77.47,27.94 71.12,27.94 JP2.1
  Bottom 0.152: v77.47,26.04 90.81,26.04 95.25,30.48 U$2.1
N$11
  Bottom 0.152: J8.3 24.77,70.48 22.86,68.58 12.06,68.58 8.89,71.75 6.99,71.75 JP11.3 JP12.1
N$12  (via drill 0.35)
  Top 0.152: v25.4,19.05 25.4,17.78 23.5,15.88 MCU2.22 | v27.94,19.05 27.94,20.95 30.48,20.95 30.48,18.41 v31.11,17.78 | v44.45,17.14 53.34,17.14 55.24,15.24 73.03,15.24 73.03,12.06 71.75,10.79 63.5,10.79 63.5,6.99 U2.7
  Bottom 0.152: v27.94,19.05 v25.4,19.05 | v31.11,17.78 31.75,17.14 v44.45,17.14
N$13
  Bottom 0.152: JP3.1 45.09,24.77 46.99,24.77 48.26,26.04 48.9,26.04 50.16,24.77 J1.2
N$14
  Bottom 0.152: JP4.1 94.61,61.59 94.61,57.78 97.16,55.24 U3.2
N$15  (via drill 0.35)
  Top 0.152: v9.53,67.94 10.79,69.22 v15.88,69.22
  Bottom 0.152: v9.53,67.94 6.99,67.94 JP10.3 | v15.88,69.22 17.78,69.22 19.05,70.48 J8.5
N$16
  Bottom 0.152: JP12.3 6.99,75.56 10.79,75.56 13.34,78.11 22.23,78.11 26.04,74.3 J8.7
N$17
  Top 0.152: IC1.8 13.97,59.69 12.06,57.78 12.06,52.7 14.61,50.16 R2.1
N$18  (via drill 0.35)
  Top 0.152: v19.68,66.04 25.4,66.04 25.4,68.58 27.3,70.48 J8.2
  Bottom 0.152: JP11.1 6.35,69.85 5.71,69.22 5.71,66.67 6.35,66.04 JP10.1 6.99,66.04 v19.68,66.04
N$19  (via drill 0.35)
  Top 0.152: v40.01,32.38 41.27,33.66 41.91,33.66 41.91,37.47 v49.53,45.09
  Bottom 0.152: v40.01,32.38 38.73,32.38 JP5.1 | v49.53,45.09 55.24,45.09 59.05,41.27 U$1.6
N$20  (via drill 0.35)
  Top 0.152: v40.01,35.56 40.64,36.2 40.64,38.1 v46.99,44.45
  Bottom 0.152: v40.01,35.56 38.73,35.56 JP1.1 | v46.99,44.45 53.34,44.45 59.05,38.73 U$1.7
N$21  (via drill 0.35)
  Top 0.152: v43.18,37.47 43.81,38.1 49.53,38.1 50.16,37.47 59.05,37.47 59.05,36.2 U$1.8
  Bottom 0.152: v43.18,37.47 41.27,39.37 39.37,39.37 38.1,40.64 JP9.2
N$22  (via drill 0.35)
  Top 0.152: v37.47,36.83 39.37,34.92 39.37,31.75 41.27,31.75 41.27,32.38 42.55,33.66 49.53,33.66 49.53,33.02 50.16,32.38 59.05,32.38 59.05,33.02 U$1.9
  Bottom 0.152: v37.47,36.83 38.73,38.1 38.73,38.73 38.1,38.73 JP8.2
NPD  (via drill 0.35)
  Top 0.152: v50.8,45.72 41.27,55.24 41.27,57.15 31.75,57.15 30.48,55.88 30.48,52.7 28.57,52.7 28.57,57.78 25.4,57.78 25.4,29.84 22.23,29.84 20.95,28.57 MCU2.33 | v55.24,45.72 58.42,42.55 60.96,42.55 60.96,39.37 v62.23,38.1 | v66.67,29.21 67.94,27.94 67.94,24.77 J1.9
  Bottom 0.152: v55.24,45.72 v50.8,45.72 | v62.23,38.1 62.23,33.66 v66.67,29.21
PPS  (via drill 0.35)
  Top 0.152: v18.41,50.8 18.41,25.4 20.32,23.5 MCU2.29 | v29.21,53.34 29.84,53.98 29.84,55.88 v33.02,59.05 | v66.67,66.04 v64.14,63.5 | v83.19,65.41 87,65.41 v87,64.77
  Bottom 0.152: v18.41,50.8 20.32,52.7 28.57,52.7 v29.21,53.34 | v33.02,59.05 43.81,59.05 45.09,60.33 45.09,61.59 47.62,64.14 63.5,64.14 v64.14,63.5 | v66.67,66.04 68.58,66.04 69.22,65.41 v83.19,65.41 | v87,64.77 96.52,64.77 98.42,62.87 98.42,58.42 97.79,57.78 U3.1
RPI_RX  (via drill 0.35)
  Top 0.152: v74.93,21.59 71.12,21.59 69.85,20.32 69.85,16.51 54.61,16.51 52.07,19.05 52.07,21.59 46.99,21.59 38.73,13.34 MCU2.TX1 | v73.66,5.71 69.85,5.71 67.94,3.81 59.69,3.81 | 59.69,3.81 59.69,2.54 J2.2 | 59.69,3.81 56.52,3.81 55.24,2.54 55.24,1.91 43.18,1.91 TP15.TP
  Bottom 0.152: v74.93,21.59 76.83,21.59 79.38,24.13 89.53,24.13 96.52,17.14 96.52,10.16 92.08,5.71 v73.66,5.71
RPI_TX
  Top 0.152: MCU2.RX1 36.2,12.7 39.37,9.53 43.81,9.53 43.81,8.89 44.45,8.26 44.45,6.99 43.18,5.71 TP14.TP
  Bottom 0.152: J2.1 56.52,2.54 45.72,2.54 43.18,5.08 TP14.TP
RST  (via drill 0.35)
  Top 0.152: v65.41,27.94 65.41,24.77 J1.8
  Bottom 0.152: v65.41,27.94 61.59,27.94 57.78,31.75 57.78,34.29 53.98,38.1 MCU2.RESET_ICSP
SCK  (via drill 0.35)
  Top 0.152: v41.27,34.29 v41.27,37.47 | v63.5,26.67 63.5,24.77 J1.7 | v52.07,13.97 52.07,10.79 56.52,10.79 60.33,6.99 U2.6 | v67.94,22.23 v72.39,22.23 | v42.55,35.56 43.81,34.29 50.16,34.29 50.8,34.92 52.07,34.92 53.34,36.2 MCU2.SCK_ICSP
  Bottom 0.152: v41.27,37.47 40.64,38.1 39.37,38.1 JP8.1 | TP7.TP 24.13,2.54 22.86,3.81 22.86,11.43 40.64,29.21 40.64,32.38 41.27,33.02 v41.27,34.29 v42.55,35.56 | v63.5,26.67 60.33,26.67 55.24,31.75 55.24,34.29 53.98,35.56 MCU2.SCK_ICSP | v52.07,13.97 52.07,15.24 55.24,18.41 61.59,18.41 62.23,19.05 62.23,22.23 | 62.23,22.23 62.23,23.5 62.87,24.13 J1.7 | v72.39,22.23 72.39,22.86 78.11,28.57 85.72,28.57 87.63,30.48 U$2.4 | 62.23,22.23 v67.94,22.23
SCK_5V  (via drill 0.35)
  Top 0.152: X2.3 51.44,69.22 51.44,67.31 52.7,66.04 56.52,66.04 56.52,67.31 60.96,71.75 69.22,71.75 69.22,69.85 X4.3 | v62.87,28.57 62.87,26.67 62.23,26.04 62.23,21.59 60.96,20.32 U2.16 | v82.55,34.92 82.55,55.24 87.63,60.33 87.63,66.04 88.27,66.67 v88.27,68.58
  Bottom 0.152: v62.87,28.57 68.58,28.57 69.85,29.84 74.3,29.84 79.38,34.92 v82.55,34.92 | v88.27,68.58 87.63,68.58 87,69.22 80.64,69.22 77.47,72.39 77.47,73.66 76.2,73.66 73.66,71.12 71.12,71.12 69.85,69.85 X4.3
SCL1  (via drill 0.35)
  Top 0.152: 91.44,4.45 97.79,10.79 97.79,12.7 MCU2.SCL1 | v33.02,27.94 33.02,36.83 U1.8 | v26.67,22.86 26.67,5.08 29.21,2.54 TP9.TP | 91.44,4.45 85.09,4.45 85.09,7.62 84.45,8.26 72.39,8.26 v72.39,7.62 | v43.81,7.62 43.18,8.26 v36.83,8.26 | 91.44,4.45 R6.2
  Bottom 0.152: JP8.3 37.47,38.73 34.29,38.73 33.02,37.47 U1.8 | v33.02,27.94 31.75,27.94 v26.67,22.86 | v72.39,7.62 72.39,6.35 70.48,4.45 46.99,4.45 v43.81,7.62 | v36.83,8.26 32.38,8.26 31.75,7.62 31.75,4.45 29.84,2.54 TP9.TP
SDA1  (via drill 0.35)
  Top 0.152: TP8.TP 29.21,6.35 29.21,9.53 27.3,11.43 27.3,39.37 32.38,39.37 U1.7 33.02,39.37 33.66,38.73 33.66,31.11 40.01,31.11 42.55,28.57 42.55,27.94 45.09,27.94 46.99,26.04 46.99,22.86 52.07,22.86 54.61,20.32 54.61,19.05 v56.52,17.14 | v70.48,16.51 v73.66,16.51
  Bottom 0.152: R5.2 91.44,7.62 91.44,8.89 95.25,12.7 MCU2.SDA1 95.25,13.34 90.17,18.41 90.17,20.95 87.63,23.5 79.38,23.5 73.66,17.78 v73.66,16.51 | JP9.3 37.47,40.64 33.66,40.64 33.02,40.01 U1.7 | v70.48,16.51 57.15,16.51 v56.52,17.14
VIN
  Top 0.152: X4.2 71.12,66.67 71.12,61.59 MCU2.VIN | TP1.TP 13.97,6.35 11.43,8.89 11.43,45.09 17.14,50.8 17.14,74.3 20.32,77.47 41.27,77.47 41.27,74.93 44.45,71.75 52.7,71.75 52.7,67.31 X2.2
  Bottom 0.152: X2.2 53.34,67.31 61.59,67.31 62.87,68.58 63.5,68.58 64.77,67.31 64.77,66.67 69.85,61.59 71.12,61.59 MCU2.VIN